# Altium PCB PCB1.PcbDoc (part 5 of 8)
Units mil, origin at the board's own origin, x right, y up, seen from the top; angles counter-clockwise.
Board outline 3820 x 2600 mil, 2 copper layers (Top Layer, Bottom Layer); 88 components, 130 nets, 566 pads, 113 vias.
Unrouted connection lines stored in the file: 16.
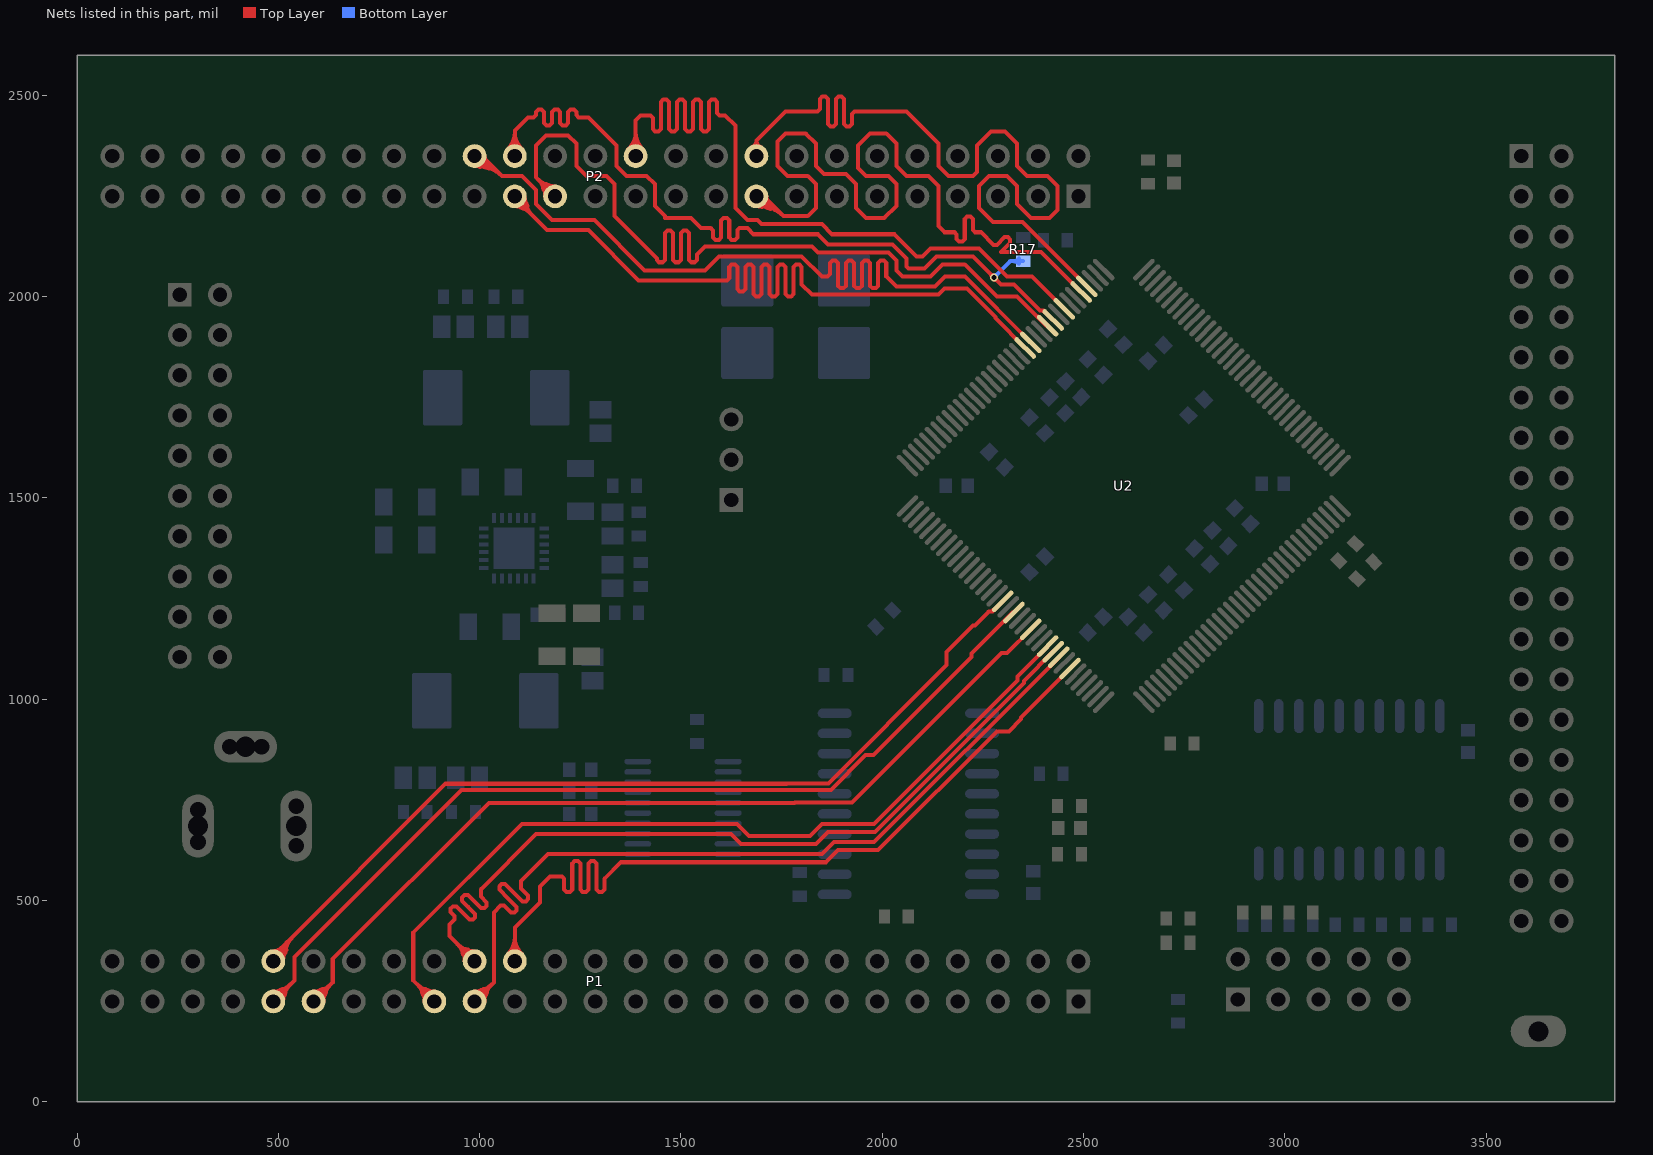
[diagram p5: the nets of this part, all layers, seen from the top]

## Via types
v1: diameter 30, hole 20, Top Layer to Bottom Layer, 74 vias
v2: diameter 20, hole 12, Top Layer to Bottom Layer, 36 vias
v3: diameter 17.72, hole 11.81, Top Layer to Bottom Layer, 3 vias

## Nets (pads, with @x,y where several pads share a name; then routed paths per layer and width w, separated by ;. In a path a pad name is that pad's centre, name@x,y a point inside that pad or via, vN(x,y) a via of type N, cw(c..) or ccw(c..) an arc to the next point about the centre after c; other vN are vias at no path point) (continued)
FSMC_D9: P1.30 U2.102 | length 2393.6
  Top Layer w10: P1.30@1087.4,349.21 1087.4,432.4 1150,495 1150,535 1175,560 1204,560 1210,554 1210,527.14 1216,521.14 1224,521.14 1230,527.14 1230,591.86 1236,597.86 1244,597.86 1250,591.86 1250,527.14 1256,521.14 1264,521.14 1270,527.14 1270,591.86 1276,597.86 1284,597.86 1290,591.86 1290,527.14 1296,521.14 1304,521.14 1310,527.14 1310,554 1351,595 1860,595 1890,625 1990,625 2285,920 2314.7,920 2345,950.3 2345,954.85 U2.102@2466.37,1076.23 ; 1087.4,384.28 cw(c1052.33,384.28) 1077.13,359.48 ccw(c1052.33,384.28) 1087.4,384.28 ; 1087.4,384.28 ccw(c1122.47,384.28) 1097.67,359.48 cw(c1122.47,384.28) 1087.4,384.28 ; 1087.4,408.43 cw(c1028.19,408.43) 1070.06,366.56 ccw(c1028.19,408.43) 1087.4,408.43 ; 1087.4,408.43 ccw(c1146.62,408.43) 1104.74,366.56 cw(c1146.62,408.43) 1087.4,408.43
FSMC_D10: P1.31 U2.100 | length 2484.6
  Top Layer w10: P1.31@982.04,250.31 cw(c1019.7,242.6) 1009.75,279.73 ; P1.31@987.4,249.21 1035,296.81 1035,470 1051.97,486.97 1060.46,486.97 1077.73,469.7 1086.21,469.7 1091.87,475.36 1091.87,483.84 1070.36,505.36 1048.84,526.87 1048.84,535.35 1054.5,541.01 1062.98,541.01 1084.5,519.5 1106.01,497.98 1114.5,497.98 1120.15,503.64 1120.15,512.13 1102.88,529.4 1102.88,547.88 1170,615 1850,615 1880,645 1979.95,645 2438.53,1103.58 U2.100@2438.53,1104.07 ; P1.31@988.5,243.85 ccw(c980.79,281.51) 1017.92,271.56 ; 1012.2,274.01 cw(c987.4,298.81) 987.4,263.74 ccw(c987.4,298.81) 1012.2,274.01 ; 1012.2,274.01 ccw(c1037,249.21) 1001.93,249.21 cw(c1037,249.21) 1012.2,274.01 ; 1029.27,291.08 cw(c987.4,332.95) 987.4,273.74 ccw(c987.4,332.95) 1029.27,291.08 ; 1029.27,291.08 ccw(c1071.14,249.21) 1011.93,249.21 cw(c1071.14,249.21) 1029.27,291.08
FSMC_D11: P1.32 U2.99 | length 2505.3
  Top Layer w10: 956.89,371.56 ccw(c994.01,381.51) P1.32@986.3,343.85 ; 965.05,379.73 cw(c955.1,342.6) P1.32@992.76,350.31 ; P1.32@987.4,349.21 925,411.61 925,440 937.83,452.83 937.83,461.31 928.1,471.05 928.1,479.53 933.75,485.19 942.24,485.19 974.79,452.64 983.27,452.64 988.93,458.3 988.93,466.78 970.36,485.36 956.38,499.33 956.38,507.82 962.04,513.47 970.52,513.47 984.5,499.5 1003.07,480.92 1011.56,480.92 1017.21,486.58 1017.21,495.07 1002.88,509.4 1002.88,527.88 1140,665 1623.75,665 1648.75,640 1835,640 1865,670 1982.33,670 2352,1039.67 2352,1045.37 U2.99@2424.62,1117.98 ; 945.53,391.08 cw(c903.66,349.21) 962.87,349.21 ccw(c903.66,349.21) 945.53,391.08 ; 945.53,391.08 ccw(c987.4,432.95) 987.4,373.74 cw(c987.4,432.95) 945.53,391.08 ; 962.6,374.01 cw(c937.8,349.21) 972.87,349.21 ccw(c937.8,349.21) 962.6,374.01 ; 962.6,374.01 ccw(c987.4,398.81) 987.4,363.74 cw(c987.4,398.81) 962.6,374.01
FSMC_D12: P1.33 U2.98 | length 2475.6
  Top Layer w10: 856.89,271.56 ccw(c894.01,281.51) P1.33@886.3,243.85 ; 865.05,279.73 cw(c855.1,242.6) P1.33@892.76,250.31 ; P1.33@887.4,249.21 835,301.61 835,420 1105,690 1638.75,690 1668.75,660 1820,660 1850,690 1979.7,690 2336,1046.3 2336,1056 2410.7,1130.7 U2.98@2410.7,1131.9 ; 845.53,291.08 cw(c803.66,249.21) 862.87,249.21 ccw(c803.66,249.21) 845.53,291.08 ; 845.53,291.08 ccw(c887.4,332.95) 887.4,273.74 cw(c887.4,332.95) 845.53,291.08 ; 862.6,274.01 cw(c837.8,249.21) 872.87,249.21 ccw(c837.8,249.21) 862.6,274.01 ; 862.6,274.01 ccw(c887.4,298.81) 887.4,263.74 cw(c887.4,298.81) 862.6,274.01
FSMC_D13: P1.39 U2.95 | length 2579.3
  Top Layer w10: P1.39@582.04,250.31 cw(c619.7,242.6) 609.75,279.73 ; P1.39@587.4,249.21 635,296.81 635,354.13 1022.87,742 1782.05,742 1783.05,743 1924.77,743 2296.77,1115 2310.28,1115 U2.95@2368.94,1173.66 ; P1.39@588.5,243.85 ccw(c580.79,281.51) 617.92,271.56 ; 612.2,274.01 cw(c587.4,298.81) 587.4,263.74 ccw(c587.4,298.81) 612.2,274.01 ; 612.2,274.01 ccw(c637,249.21) 601.93,249.21 cw(c637,249.21) 612.2,274.01 ; 629.27,291.08 cw(c587.4,332.95) 587.4,273.74 ccw(c587.4,332.95) 629.27,291.08 ; 629.27,291.08 ccw(c671.14,249.21) 611.93,249.21 cw(c671.14,249.21) 629.27,291.08
FSMC_D14: P1.42 U2.90 | length 2774.8
  Top Layer w10: P1.42@481.93,349.1 cw(c511.35,349.69) 503.73,378.12 ; P1.42@485.78,353.44 ccw(c462.99,413.02) 524.6,396.51 ; P1.42@486.47,353.64 ccw(c480.48,382.31) 508.77,374.73 ; P1.42@487.4,349.21 487.4,362.4 915,790 1762.16,790 1763.16,791 1866,791 2160,1085 2160,1116.77 2225.92,1182.69 2230.01,1182.69 2264.64,1217.31 ; P1.42@489.36,344.1 ccw(c471.64,390.41) 519.53,377.57 ; U2.90@2299.34,1243.26 2273.39,1217.31 2264.64,1217.31 ; 2264.64,1217.31 ccw(c2264.64,1235.38) 2277.8,1223 cw(c2264.64,1235.38) 2264.64,1217.31 ; P1.42@487.4,373.74 ccw(c487.4,401.11) 506.76,381.76 cw(c487.4,401.11) P1.42@487.4,373.74 ; P1.42@491.93,349.21 cw(c534.7,349.21) 504.46,379.46 ccw(c534.7,349.21) P1.42@491.93,349.21 ; P1.42@501.93,349.21 cw(c568.84,349.21) 521.53,396.53 ccw(c568.84,349.21) P1.42@501.93,349.21 ; P1.42@511.93,349.21 cw(c602.98,349.21) 538.6,413.6 ccw(c602.98,349.21) P1.42@511.93,349.21
FSMC_D15: P1.41 U2.92 | length 2676.7
  Top Layer w10: P1.41@482.04,250.31 cw(c519.7,242.6) 509.75,279.73 ; P1.41@487.4,249.21 540,301.81 540,359.13 954.87,774 1768.79,774 1769.79,775 1872.63,775 1958.63,861 1977.77,861 2221.31,1104.54 2221.31,1113.08 2323.65,1215.42 U2.92@2327.18,1215.42 ; P1.41@488.5,243.85 ccw(c480.79,281.51) 517.92,271.56 ; 512.2,274.01 cw(c487.4,298.81) 487.4,263.74 ccw(c487.4,298.81) 512.2,274.01 ; 512.2,274.01 ccw(c537,249.21) 501.93,249.21 cw(c537,249.21) 512.2,274.01 ; 529.27,291.08 cw(c487.4,332.95) 487.4,273.74 ccw(c487.4,332.95) 529.27,291.08 ; 529.27,291.08 ccw(c571.14,249.21) 511.93,249.21 cw(c571.14,249.21) 529.27,291.08 ; 2298.73,1190.5 cw(c2306.3,1182.93) 2306.3,1193.64 ccw(c2306.3,1182.93) 2298.73,1190.5
FSMC_NBL0: P2.17 U2.41 | length 3011
  Top Layer w10: P2.17@1687.4,2249.21 1705.79,2249.21 1755,2200 ; P2.17@1696.23,2226.33 cw(c1699.32,2218.3) 1705.31,2224.47 cw(c1709.18,2228.46) P2.17@1705.16,2232.29 ; U2.41@2494.21,2011.61 2394.82,2111.01 2295,2111.01 2317.5,2133.51 2317.5,2141.99 2311.85,2147.65 2303.36,2147.65 2284.6,2128.89 2276.11,2128.89 2245,2160 2231,2160 2225,2166 2225,2192.54 2219,2198.54 2211,2198.54 2205,2192.54 2205,2143.46 2199,2137.46 2191,2137.46 2185,2143.46 2185,2154 2179,2160 2155,2160 2140,2175 2140,2275 2115,2300 2060,2300 2035,2325 2035,2380 2010,2405 1970,2405 1940,2375 1940,2320 1960,2300 2015,2300 2035,2280 2035,2225 2005,2195 1960,2195 1935,2220 1935,2280 1910,2305 1855,2305 1835,2325 1835,2380 1810,2405 1760,2405 1740,2385 1740,2325 1765,2300 1815,2300 1835,2280 1835,2220 1815,2200 1755,2200 ; P2.17@1674.12,2241.27 ccw(c1708.72,2261.96) 1700.94,2222.4 ; P2.17@1674.12,2241.27 ccw(c1708.72,2261.96) 1700.94,2222.4 ; P2.17@1674.12,2241.27 ccw(c1708.72,2261.96) 1700.94,2222.4 ; P2.17@1682.7,2246.4 ccw(c1734.66,2277.47) 1722.98,2218.07 ; P2.17@1682.7,2246.4 ccw(c1734.66,2277.47) 1722.98,2218.07 ; P2.17@1682.7,2246.4 ccw(c1734.66,2277.47) 1722.98,2218.07 ; P2.17@1687.71,2244.69 cw(c1690.86,2198.11) 1723.87,2231.13 ; P2.17@1687.71,2244.69 cw(c1690.86,2198.11) 1723.87,2231.13 ; P2.17@1687.71,2244.69 cw(c1690.86,2198.11) 1723.87,2231.13 ; P2.17@1688.38,2234.72 cw(c1692.83,2168.96) 1739.44,2215.56 ; P2.17@1688.38,2234.72 cw(c1692.83,2168.96) 1739.44,2215.56 ; P2.17@1688.38,2234.72 cw(c1692.83,2168.96) 1739.44,2215.56 ; P2.17@1689.06,2224.74 cw(c1694.81,2139.81) 1755,2200 ; P2.17@1689.06,2224.74 cw(c1694.81,2139.81) 1755,2200 ; P2.17@1689.06,2224.74 cw(c1694.81,2139.81) 1755,2200 ; P2.17@1691.58,2250.95 ccw(c1725.96,2265.29) 1718.77,2228.74 ; P2.17@1691.58,2250.95 ccw(c1725.96,2265.29) 1718.77,2228.74 ; P2.17@1691.58,2250.95 ccw(c1725.96,2265.29) 1718.77,2228.74 ; P2.17@1711.93,2249.21 ccw(c1726.75,2249.21) 1716.27,2238.73 ; P2.17@1711.93,2249.21 ccw(c1726.75,2249.21) 1716.27,2238.73 ; P2.17@1711.93,2249.21 ccw(c1726.75,2249.21) 1716.27,2238.73
FSMC_NBL1: P2.18 U2.40 | length 2217
  Top Layer w10: P2.18@1687.4,2349.21 1687.4,2387.4 ; U2.40@2508.13,2025.53 2348.66,2185 2275,2185 2240,2220 2240,2275 2265,2300 2310,2300 2335,2275 2335,2230 2370,2195 2415,2195 2435,2215 2435,2275 2410,2300 2360,2300 2335,2325 2335,2380 2305,2410 2270,2410 2235,2375 2235,2310 2225,2300 2165,2300 2140,2325 2140,2380 2060,2460 1931,2460 1925,2454 1925,2428.6 1919,2422.6 1911,2422.6 1905,2428.6 1905,2491.4 1899,2497.4 1891,2497.4 1885,2491.4 1885,2428.6 1879,2422.6 1871,2422.6 1865,2428.6 1865,2491.4 1859,2497.4 1851,2497.4 1845,2491.4 1845,2466 1839,2460 1760,2460 1687.4,2387.4 ; P2.18@1677.2,2371.52 ccw(c1669.94,2387.4) 1687.4,2387.4 ; P2.18@1677.2,2371.52 ccw(c1669.94,2387.4) 1687.4,2387.4 ; P2.18@1677.2,2371.52 ccw(c1669.94,2387.4) 1687.4,2387.4 ; 1687.4,2387.4 ccw(c1704.87,2387.4) P2.18@1697.6,2371.52 ; 1687.4,2387.4 ccw(c1704.87,2387.4) P2.18@1697.6,2371.52 ; 1687.4,2387.4 ccw(c1704.87,2387.4) P2.18@1697.6,2371.52
FSMC_NE1: P2.27 U2.47 | length 2796.3
  Top Layer w10: P2.27@1187.4,2249.21 1140,2296.61 1140,2375 1165,2400 1220,2400 1240,2380 1240,2325 1265,2300 1315,2300 1335,2280 1335,2200 1440,2095 1440,2091.45 1446,2085.45 1454,2085.45 1460,2091.45 1460,2158.55 1466,2164.55 1474,2164.55 1480,2158.55 1480,2091.45 1486,2085.45 1494,2085.45 1500,2091.45 1500,2158.55 1506,2164.55 1514,2164.55 1520,2158.55 1520,2091.45 1526,2085.45 1534,2085.45 1540,2091.45 1540,2105 1560,2125 1825,2125 1840,2110 2015,2110 2035,2090 2035,2065 2050,2050 2120,2050 2150,2080 2205,2080 2285,2000 2335.29,2000 2407.2,1928.1 U2.47@2410.7,1928.1 ; 1145.53,2291.08 cw(c1103.66,2249.21) P2.27@1162.87,2249.21 ; 1145.53,2291.08 ccw(c1187.4,2332.95) P2.27@1187.4,2273.74 ; 1145.53,2291.08 cw(c1103.66,2249.21) P2.27@1162.87,2249.21 ; 1145.53,2291.08 ccw(c1187.4,2332.95) P2.27@1187.4,2273.74 ; 1145.53,2291.08 ccw(c1187.4,2332.95) P2.27@1187.4,2273.74 ; 1145.53,2291.08 cw(c1103.66,2249.21) P2.27@1162.87,2249.21 ; 1156.89,2271.56 ccw(c1194.01,2281.51) P2.27@1186.3,2243.85 ; 1156.89,2271.56 ccw(c1194.01,2281.51) P2.27@1186.3,2243.85 ; 1156.89,2271.56 ccw(c1194.01,2281.51) P2.27@1186.3,2243.85 ; 1162.6,2274.01 cw(c1137.8,2249.21) P2.27@1172.87,2249.21 ; 1162.6,2274.01 ccw(c1187.4,2298.81) P2.27@1187.4,2263.74 ; 1162.6,2274.01 cw(c1137.8,2249.21) P2.27@1172.87,2249.21 ; 1162.6,2274.01 ccw(c1187.4,2298.81) P2.27@1187.4,2263.74 ; 1162.6,2274.01 ccw(c1187.4,2298.81) P2.27@1187.4,2263.74 ; 1162.6,2274.01 cw(c1137.8,2249.21) P2.27@1172.87,2249.21 ; 1165.05,2279.73 cw(c1155.1,2242.6) P2.27@1192.76,2250.31 ; 1165.05,2279.73 cw(c1155.1,2242.6) P2.27@1192.76,2250.31 ; 1165.05,2279.73 cw(c1155.1,2242.6) P2.27@1192.76,2250.31 ; 2382.3,1952.99 ccw(c2389.82,1960.51) U2.47@2389.82,1949.88 ; 2382.3,1952.99 ccw(c2389.82,1960.51) U2.47@2389.82,1949.88 ; 2382.3,1952.99 ccw(c2389.82,1960.51) U2.47@2389.82,1949.88
FSMC_NL: P2.24 U2.44 | length 2515.1
  Top Layer w10: P2.24@1387.4,2349.21 1387.4,2437.4 1400,2450 1424,2450 1430,2444 1430,2416 1436,2410 1444,2410 1450,2416 1450,2484 1456,2490 1464,2490 1470,2484 1470,2416 1476,2410 1484,2410 1490,2416 1490,2484 1496,2490 1504,2490 1510,2484 1510,2416 1516,2410 1524,2410 1530,2416 1530,2484 1536,2490 1544,2490 1550,2484 1550,2416 1556,2410 1564,2410 1570,2416 1570,2484 1576,2490 1584,2490 1590,2484 1590,2456 1596,2450 1610,2450 1635,2425 1635,2220 1665,2190 1690,2190 1700,2180 1850,2180 1875,2155 2030,2155 2085,2100 2100,2100 2120,2120 2240,2120 2310,2050 2372.31,2050 U2.44@2452.45,1969.85 ; P2.24@1370.06,2366.56 ccw(c1328.19,2408.43) 1387.4,2408.43 ; P2.24@1370.06,2366.56 ccw(c1328.19,2408.43) 1387.4,2408.43 ; P2.24@1370.06,2366.56 ccw(c1328.19,2408.43) 1387.4,2408.43 ; P2.24@1377.13,2359.48 ccw(c1352.33,2384.28) 1387.4,2384.28 ; P2.24@1377.13,2359.48 ccw(c1352.33,2384.28) 1387.4,2384.28 ; P2.24@1377.13,2359.48 ccw(c1352.33,2384.28) 1387.4,2384.28 ; 1387.4,2384.28 ccw(c1422.47,2384.28) P2.24@1397.67,2359.48 ; 1387.4,2384.28 ccw(c1422.47,2384.28) P2.24@1397.67,2359.48 ; 1387.4,2384.28 ccw(c1422.47,2384.28) P2.24@1397.67,2359.48 ; 1387.4,2408.43 ccw(c1446.62,2408.43) P2.24@1404.74,2366.56 ; 1387.4,2408.43 ccw(c1446.62,2408.43) P2.24@1404.74,2366.56 ; 1387.4,2408.43 ccw(c1446.62,2408.43) P2.24@1404.74,2366.56
FSMC_NOE: P2.32 U2.50 | length 3007.3
  Top Layer w10: P2.32@987.4,2349.21 1005.79,2349.21 1055,2300 ; P2.32@996.23,2326.33 cw(c999.32,2318.3) 1005.31,2324.47 cw(c1009.18,2328.46) P2.32@1005.16,2332.29 ; U2.50@2368.94,1886.34 2205.28,2050 2156.46,2050 2131.46,2025 2035,2025 2010,2050 2010,2084 2004,2090 1996,2090 1990,2084 1990,2027 1984,2021 1976,2021 1970,2027 1970,2084 1964,2090 1956,2090 1950,2084 1950,2027 1944,2021 1936,2021 1930,2027 1930,2084 1924,2090 1916,2090 1910,2084 1910,2027 1904,2021 1896,2021 1890,2027 1890,2084 1884,2090 1876,2090 1870,2084 1870,2056 1864,2050 1850,2050 1800,2100 1595,2100 1560,2065 1410,2065 1285,2190 1180,2190 1140,2230 1140,2265 1105,2300 1055,2300 ; P2.32@974.12,2341.27 ccw(c1008.72,2361.96) 1000.94,2322.4 ; P2.32@974.12,2341.27 ccw(c1008.72,2361.96) 1000.94,2322.4 ; P2.32@974.12,2341.27 ccw(c1008.72,2361.96) 1000.94,2322.4 ; P2.32@982.7,2346.4 ccw(c1034.66,2377.47) 1022.98,2318.07 ; P2.32@982.7,2346.4 ccw(c1034.66,2377.47) 1022.98,2318.07 ; P2.32@982.7,2346.4 ccw(c1034.66,2377.47) 1022.98,2318.07 ; P2.32@987.71,2344.69 cw(c990.86,2298.11) 1023.87,2331.13 ; P2.32@987.71,2344.69 cw(c990.86,2298.11) 1023.87,2331.13 ; P2.32@987.71,2344.69 cw(c990.86,2298.11) 1023.87,2331.13 ; P2.32@988.38,2334.72 cw(c992.83,2268.96) 1039.44,2315.56 ; P2.32@988.38,2334.72 cw(c992.83,2268.96) 1039.44,2315.56 ; P2.32@988.38,2334.72 cw(c992.83,2268.96) 1039.44,2315.56 ; P2.32@989.06,2324.74 cw(c994.81,2239.81) 1055,2300 ; P2.32@989.06,2324.74 cw(c994.81,2239.81) 1055,2300 ; P2.32@989.06,2324.74 cw(c994.81,2239.81) 1055,2300 ; P2.32@991.58,2350.95 ccw(c1025.96,2365.29) 1018.77,2328.74 ; P2.32@991.58,2350.95 ccw(c1025.96,2365.29) 1018.77,2328.74 ; P2.32@991.58,2350.95 ccw(c1025.96,2365.29) 1018.77,2328.74 ; P2.32@1011.93,2349.21 ccw(c1026.75,2349.21) 1016.27,2338.73 ; P2.32@1011.93,2349.21 ccw(c1026.75,2349.21) 1016.27,2338.73 ; P2.32@1011.93,2349.21 ccw(c1026.75,2349.21) 1016.27,2338.73
FSMC_NWAIT: P2.30 R17.2 U2.46 | length 2852.9
  Top Layer w10: P2.30@1087.4,2349.21 1087.4,2412.4 1120,2445 1134,2445 1140,2451 1140,2459 1146,2465 1154,2465 1160,2459 1160,2431 1166,2425 1174,2425 1180,2431 1180,2459 1186,2465 1194,2465 1200,2459 1200,2431 1206,2425 1214,2425 1220,2431 1220,2459 1226,2465 1234,2465 1240,2459 1240,2451 1246,2445 1270,2445 1340,2375 1340,2325 1365,2300 1415,2300 1435,2280 1435,2225 1460,2200 1460,2195 1525,2195 1550,2170 1574,2170 1580,2164 1580,2147 1586,2141 1594,2141 1600,2147 1600,2189 1606,2195 1614,2195 1620,2189 1620,2147 1626,2141 1634,2141 1640,2147 1640,2165 1645,2170 1665,2170 1680,2155 1840,2155 1865,2130 2025,2130 2060,2095 2060,2075 2065,2070 2105,2070 2135,2100 2225,2100 v2(2277.5,2047.5) 2295,2030 2327.92,2030 2392.04,1965.88 2400.75,1965.88 U2.46@2424.62,1942.01 ; P2.30@1070.06,2366.56 ccw(c1028.19,2408.43) 1087.4,2408.43 ; P2.30@1070.06,2366.56 ccw(c1028.19,2408.43) 1087.4,2408.43 ; P2.30@1070.06,2366.56 ccw(c1028.19,2408.43) 1087.4,2408.43 ; P2.30@1077.13,2359.48 ccw(c1052.33,2384.28) 1087.4,2384.28 ; P2.30@1077.13,2359.48 ccw(c1052.33,2384.28) 1087.4,2384.28 ; P2.30@1077.13,2359.48 ccw(c1052.33,2384.28) 1087.4,2384.28 ; 1087.4,2384.28 ccw(c1122.47,2384.28) P2.30@1097.67,2359.48 ; 1087.4,2384.28 ccw(c1122.47,2384.28) P2.30@1097.67,2359.48 ; 1087.4,2384.28 ccw(c1122.47,2384.28) P2.30@1097.67,2359.48 ; 1087.4,2408.43 ccw(c1146.62,2408.43) P2.30@1104.74,2366.56 ; 1087.4,2408.43 ccw(c1146.62,2408.43) P2.30@1104.74,2366.56 ; 1087.4,2408.43 ccw(c1146.62,2408.43) P2.30@1104.74,2366.56 ; 2268.96,2056.04 cw(c2260.43,2047.5) v2@2272.5,2047.5 ; 2268.96,2056.04 ccw(c2277.5,2064.57) v2@2277.5,2052.5 ; 2268.96,2056.04 cw(c2260.43,2047.5) v2@2272.5,2047.5 ; 2268.96,2056.04 ccw(c2277.5,2064.57) v2@2277.5,2052.5 ; 2268.96,2056.04 ccw(c2277.5,2064.57) v2@2277.5,2052.5 ; 2268.96,2056.04 cw(c2260.43,2047.5) v2@2272.5,2047.5 ; v2@2277.5,2042.5 cw(c2277.5,2030.43) 2286.04,2038.96 ; v2@2277.5,2042.5 cw(c2277.5,2030.43) 2286.04,2038.96 ; v2@2277.5,2042.5 cw(c2277.5,2030.43) 2286.04,2038.96 ; v2@2282.5,2047.5 ccw(c2294.57,2047.5) 2286.04,2038.96 ; v2@2282.5,2047.5 ccw(c2294.57,2047.5) 2286.04,2038.96 ; v2@2282.5,2047.5 ccw(c2294.57,2047.5) 2286.04,2038.96 ; 2394.34,1965.88 cw(c2394.34,1953.49) U2.46@2403.1,1962.25 ; 2394.34,1965.88 cw(c2394.34,1953.49) U2.46@2403.1,1962.25 ; 2394.34,1965.88 cw(c2394.34,1953.49) U2.46@2403.1,1962.25
  Bottom Layer w10: v2(2277.5,2047.5) 2318.04,2088.04 R17.2@2350,2088.04 ; v2@2277.5,2052.5 ccw(c2277.5,2064.57) 2286.04,2056.04 ; v2@2277.5,2052.5 ccw(c2277.5,2064.57) 2286.04,2056.04 ; v2@2277.5,2052.5 ccw(c2277.5,2064.57) 2286.04,2056.04 ; v2@2282.5,2047.5 cw(c2294.57,2047.5) 2286.04,2056.04 ; v2@2282.5,2047.5 cw(c2294.57,2047.5) 2286.04,2056.04 ; v2@2282.5,2047.5 cw(c2294.57,2047.5) 2286.04,2056.04 ; 2324.87,2088.04 cw(c2324.87,2066.84) R17.2@2339.85,2081.83 ; 2324.87,2088.04 ccw(c2324.87,2109.23) R17.2@2339.85,2094.24 ; 2324.87,2088.04 cw(c2324.87,2066.84) R17.2@2339.85,2081.83 ; 2324.87,2088.04 ccw(c2324.87,2109.23) R17.2@2339.85,2094.24 ; 2324.87,2088.04 ccw(c2324.87,2109.23) R17.2@2339.85,2094.24 ; 2324.87,2088.04 cw(c2324.87,2066.84) R17.2@2339.85,2081.83
FSMC_NWE: P2.29 U2.51 | length 2714
  Top Layer w10: P2.29@1087.4,2249.21 1087.4,2244.97 1167.37,2165 1270,2165 1395,2040 1614,2040 1620,2046 1620,2074 1626,2080 1634,2080 1640,2074 1640,2019.24 1646,2013.24 1654,2013.24 1660,2019.24 1660,2074 1666,2080 1674,2080 1680,2074 1680,2006 1686,2000 1694,2000 1700,2006 1700,2074 1706,2080 1714,2080 1720,2074 1720,2006 1726,2000 1734,2000 1740,2006 1740,2074 1746,2080 1754,2080 1760,2074 1760,2006 1766,2000 1774,2000 1780,2006 1780,2074 1786,2080 1794,2080 1800,2074 1800,2030 1825,2005 2140,2005 2155,2020 2210,2020 2280.87,1949.13 2280.87,1946.57 U2.51@2355.02,1872.42 ; P2.29@1081.98,2248.46 ccw(c1116.95,2253.32) 1107.81,2219.21 ; P2.29@1081.98,2248.46 ccw(c1116.95,2253.32) 1107.81,2219.21 ; P2.29@1081.98,2248.46 ccw(c1116.95,2253.32) 1107.81,2219.21 ; P2.29@1087.4,2224.68 cw(c1087.4,2175.71) 1122.03,2210.34 ; P2.29@1087.4,2224.68 cw(c1087.4,2175.71) 1122.03,2210.34 ; P2.29@1087.4,2224.68 cw(c1087.4,2175.71) 1122.03,2210.34 ; P2.29@1088.81,2254.5 cw(c1078.07,2214.11) 1118.43,2224.93 ; P2.29@1088.81,2254.5 cw(c1078.07,2214.11) 1118.43,2224.93 ; P2.29@1088.81,2254.5 cw(c1078.07,2214.11) 1118.43,2224.93 ; P2.29@1101.93,2249.21 ccw(c1147.24,2249.21) 1115.2,2217.17 ; P2.29@1101.93,2249.21 ccw(c1147.24,2249.21) 1115.2,2217.17 ; P2.29@1101.93,2249.21 ccw(c1147.24,2249.21) 1115.2,2217.17 ; P2.29@1111.93,2249.21 ccw(c1181.38,2249.21) 1132.27,2200.1 ; P2.29@1111.93,2249.21 ccw(c1181.38,2249.21) 1132.27,2200.1 ; P2.29@1111.93,2249.21 ccw(c1181.38,2249.21) 1132.27,2200.1